# Altium PCB Drive-motor V1.0.2.PcbDoc
Units mm, origin at the board's own origin, x right, y up, seen from the top; angles counter-clockwise.
Board outline 118.48 x 107.72 mm, 4 copper layers (Top Layer, Mid-Layer 1, Mid-Layer 2, Bottom Layer); 68 components, 59 nets, 342 pads, 542 vias.
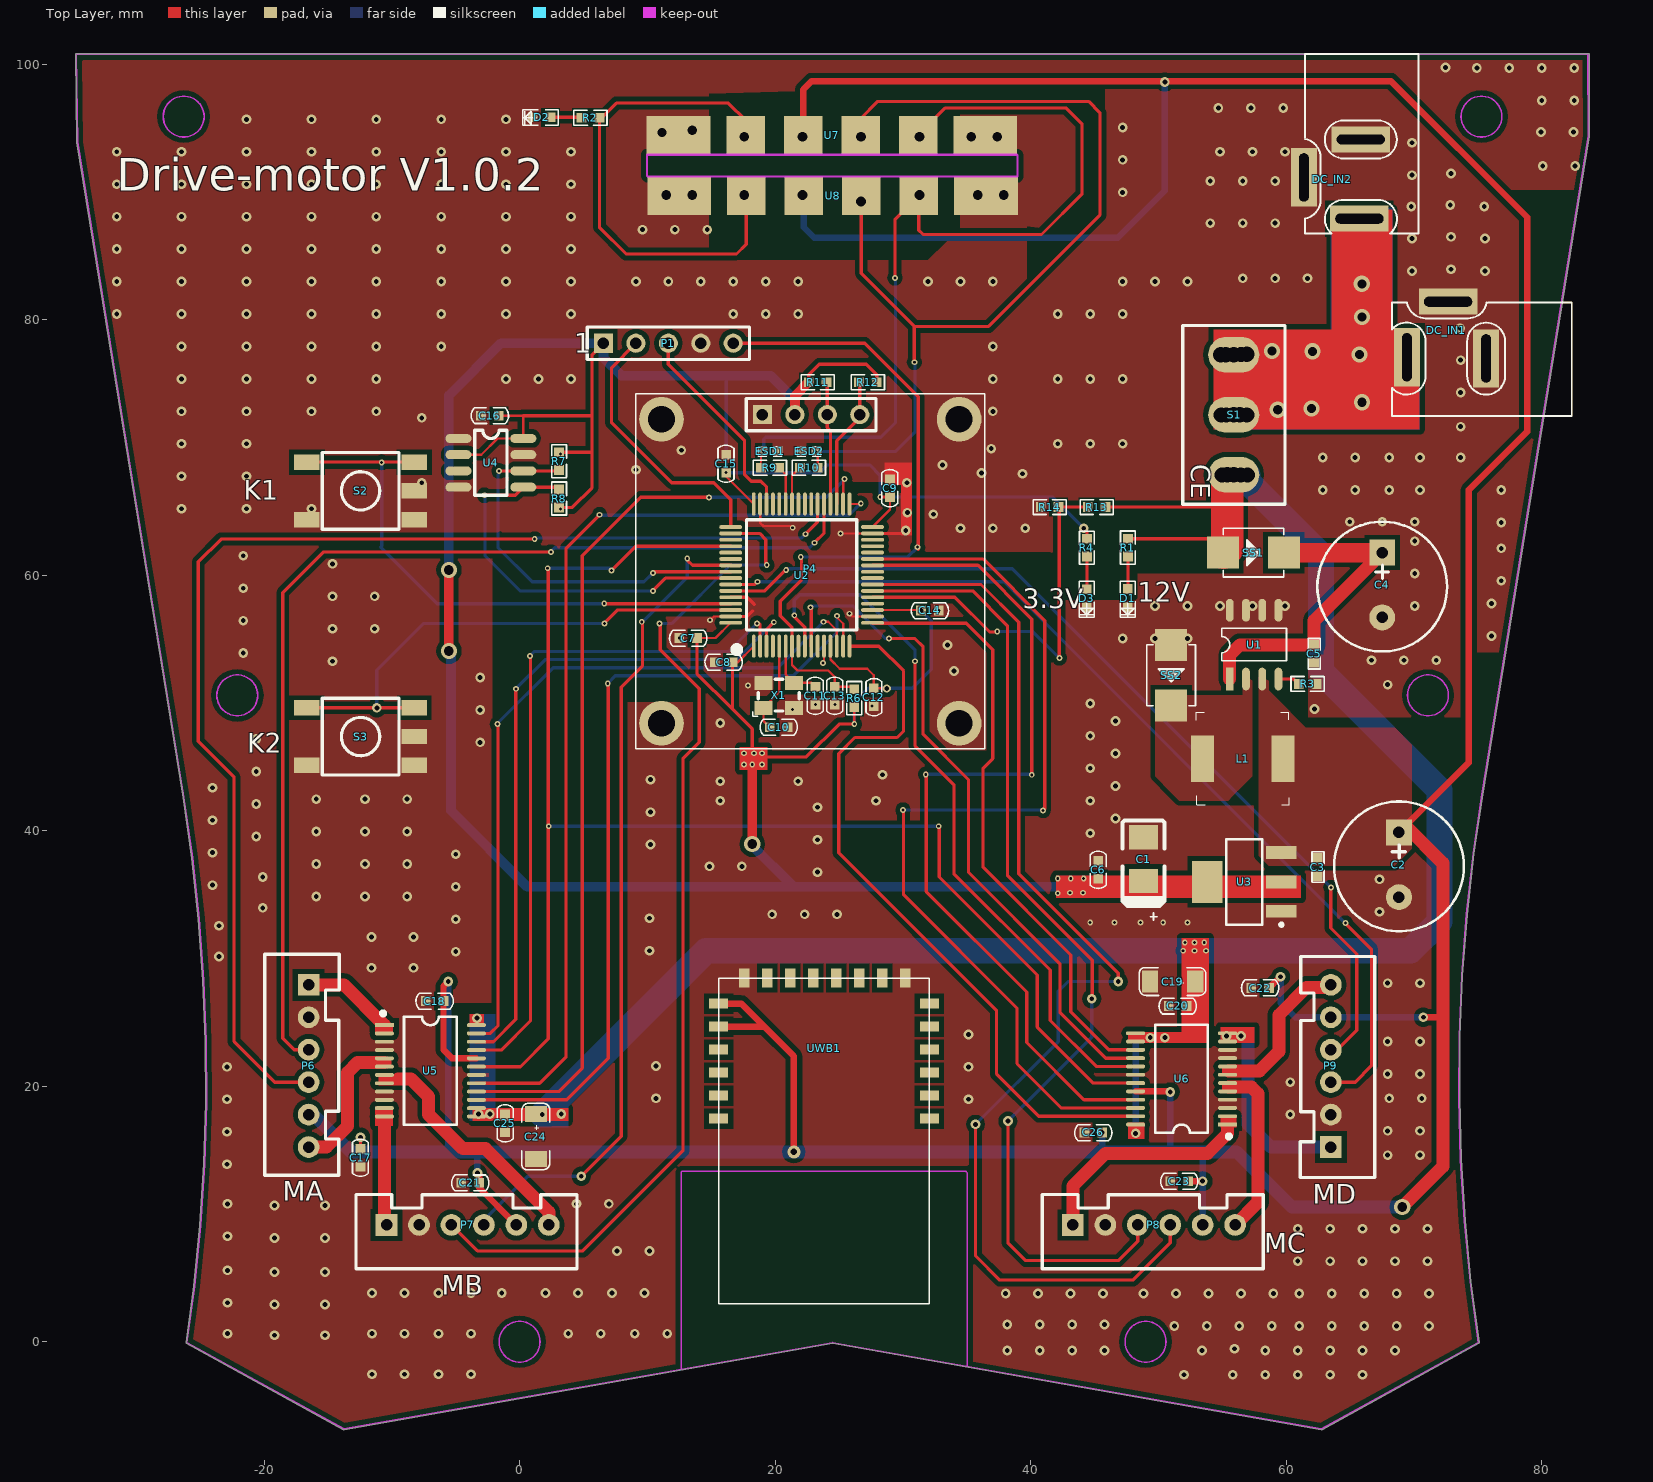
[diagram p0: Top Layer view]
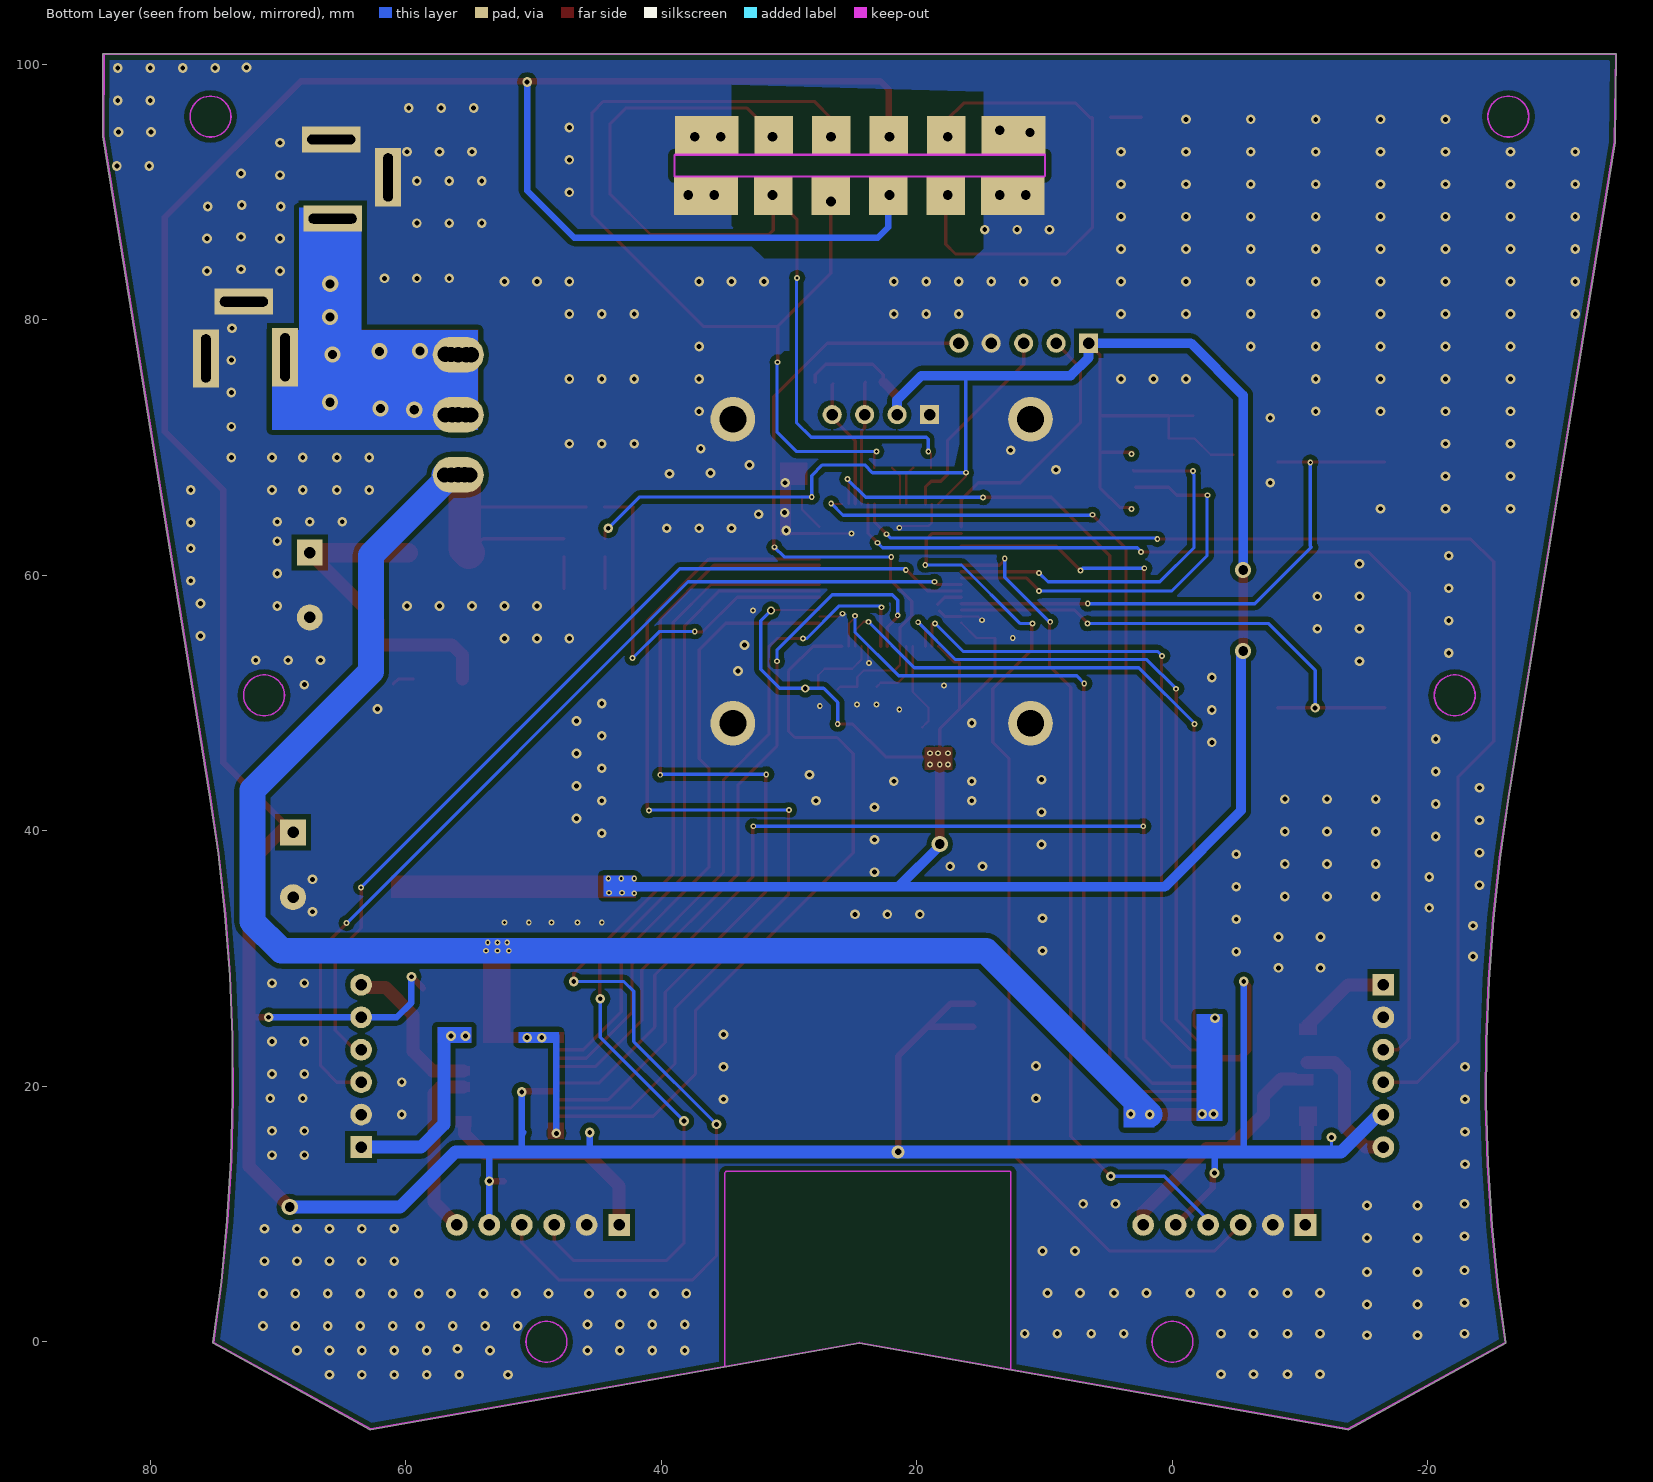
[diagram p1: Bottom Layer view, seen from below]

## Layer stack, top to bottom
Top Solder: solder mask 0.0102, Solder Resist, Dk 3.5
Top Layer: signal copper 0.0356
Dielectric 1: dielectric 0.32, FR-4, Dk 4.8
Mid-Layer 1: signal copper 0.0356
Dielectric3: dielectric 0.32, FR-4, Dk 4.8
Mid-Layer 2: signal copper 0.0356
Dielectric2: dielectric 0.32, FR-4, Dk 4.8
Bottom Layer: signal copper 0.0356
Bottom Solder: solder mask 0.0102, Solder Resist, Dk 3.5

## Board outline
-26.071,-0.119 ccw(c-26.04,-0.063) -26.071,-0.119 -13.791,-6.883 -13.79,-6.883 ccw(c-13.759,-6.827) -13.748,-6.89 24.499,-0.128 62.747,-6.89 ccw(c62.759,-6.827) 62.789,-6.883 62.79,-6.883 75.07,-0.119 ccw(c75.039,-0.063) 75.103,-0.063 ccw(c75.039,-0.063) 75.103,-0.055 ccw(c75.039,-0.063) 75.102,-0.054 75.103,-0.054 75.103,-0.055 75.102,-0.054 74.47,4.706 74.47,4.705 74.47,4.706 74.47,4.708 cw(c74.407,4.699) 74.47,4.708 74.47,4.706 74.004,9.481 74.004,9.482 74.004,9.481 74.004,9.48 74.004,9.481 73.704,14.269 73.704,14.268 73.704,14.269 73.704,14.271 73.704,14.269 73.571,19.065 73.604,23.863 73.804,28.656 74.17,33.44 74.701,38.208 75.337,42.577 83.729,94.374 ccw(c83.666,94.384) 83.73,94.384 83.73,100.766 ccw(c83.666,100.766) 83.649,100.827 ccw(c83.632,100.766) 83.632,100.83 -34.69,100.83 ccw(c-34.69,100.766) -34.754,100.765 -34.654,93.908 ccw(c-34.59,93.909) -34.653,93.899 cw(c-34.59,93.909) -34.654,93.908 -34.653,93.899 -26.342,42.605 -25.657,37.857 -25.657,37.855 -25.657,37.857 -25.138,33.087 -25.138,33.088 -25.138,33.087 -25.138,33.086 cw(c-25.074,33.093) -25.138,33.086 -25.138,33.087 -24.784,28.303 -24.784,28.304 -24.784,28.303 -24.784,28.302 -24.784,28.303 -24.597,23.509 -24.576,18.711 -24.576,18.712 -24.576,18.711 -24.722,13.916 -24.722,13.917 -24.722,13.916 -24.722,13.915 -24.722,13.916 -25.034,9.129 -25.034,9.13 -25.034,9.129 -25.034,9.127 -25.034,9.129 -25.512,4.355 -25.512,4.356 -25.512,4.355 -25.512,4.354 -25.512,4.355 -26.103,-0.054 ccw(c-26.04,-0.063)

## Design rules (kind name [scope] priority, off if disabled: settings)
Clearance [All] p1: gap=0.254 except(0.381: Arc-Poly Track-Poly SMDPad-Poly THPad-Poly Via-Poly Fill-Poly Poly-Poly)
PolygonConnect [All] p1: connectstyle=Direct reliefconductorwidth=0.254 reliefentries=4 polygonreliefangle="90 Angle" airgapwidth=0.254
RoutingVias [All] p1: holewidth=0.711 width=1.27 viastyle="Through Hole" minholewidth=0.711 minwidth=1.27 maxholewidth=0.711 maxwidth=1.27
SolderMaskExpansion [All] p1: expansion=0.102
Width Width_6 [All] p1: maxlimit=2.54 minlimit=0.254 preferedwidth=0.254 minimp=50.000000 maximp=50.000000 favimp=50.000000
Width Width_5 [All] p2: maxlimit=1.524 minlimit=0.254 preferedwidth=0.254 midlayer1_maxwidth=1.27 midlayer2_maxwidth=1.27 bottomlayer_maxwidth=1.27 minimp=50.000000 maximp=50.000000 favimp=50.000000
Width Width_4 [All] p3: maxlimit=0.254 minlimit=0.127 preferedwidth=0.254 minimp=50.000000 maximp=50.000000 favimp=50.000000
Width Width_3 [All] p4: maxlimit=1.27 minlimit=0.254 preferedwidth=0.254 minimp=50.000000 maximp=50.000000 favimp=50.000000
Width Width_2 [All] p5: maxlimit=0.254 minlimit=0.127 preferedwidth=0.254 minimp=50.000000 maximp=50.000000 favimp=50.000000
Width Width_1 [All] p6: maxlimit=2.54 minlimit=0.254 preferedwidth=0.254 minimp=50.000000 maximp=50.000000 favimp=50.000000
Width [All] p7: maxlimit=0.254 minlimit=0.254 preferedwidth=0.254
30 further rules are at their usual default settings.

## Components (designator, comment, footprint, x,y, rotation, side; value= is the part's Value field where it differs from the comment)
C1 "10uF" ALX_E 48.854,37.774 r90 top
C2 "470uF" "CAP POL [35V]" 68.834,37.338 r270 top
C3 "100nF" ALX_0603C 62.484,37.084 r270 top
C4 "470uF" "CAP POL [35V]" 67.523,59.237 r270 top
C5 "1uF" ALX_0603C 62.189,53.776 r270 top
C6 "100nF" 0603C 45.298,37.012 r90 top
C7 "100nF" 0603C 13.12,55.083 r180 top
C8 "100nF" 0603C 16.041,53.178 r0 top
C9 "100nF" 0603C 28.995,66.894 r90 top
C10 "12pF" 0603C 20.359,48.098 r0 top
C11 "12pF" 0603C 23.153,50.638 r90 top
C12 "100nF" 0603C 27.725,50.384 r270 top
C13 "100nF" 0603C 24.677,50.638 r90 top
C14 "100nF" 0603C 32.043,57.242 r180 top
C15 "100nF" 0603C 16.168,68.799 r90 top
C16 "100nF" 0603C -2.247,72.482 r0 top
C17 "100nF" 0603C -12.446,14.478 r90 top
C18 "100nF" 0603C -6.731,26.67 r180 top
C19 "Cap Pol" CAP[1206] 51.181,28.194 r180 top
C20 "100nF" 0603C 51.435,26.289 r180 top
C21 "100nF" 0603C -3.937,12.446 r180 top
C22 "100nF" 0603C 58.039,27.686 r0 top
C23 "100nF" 0603C 51.562,12.573 r180 top
C24 "Cap Pol" CAP[1206] 1.27,16.129 r270 top
C25 "100nF" 0603C -1.143,17.018 r270 top
C26 "100nF" 0603C 44.831,16.383 r180 top
D1 "LED" LED[0603] 47.618,58.227 r90 top
D2 "LED" LED[0603] 1.737,95.813 r0 top
D3 "LED" LED[0603] 44.409,58.221 r90 top
DC_IN1 "POWER" DC10B 75.651,77.017 r180 top
DC_IN2 "POWER" DC10B 65.786,94.107 r270 top
ESD1 "PGB1010402" ALX_0402A 20.105,69.688 r180 top
ESD2 "PGB1010402" ALX_0402A 23.153,69.688 r180 top
L1 "68uH" Inductor_0650_47UH 56.601,45.648 r0 top
P1 "SWD" H2.54-1X5 11.643,78.16 r0 top
P4 "H4X1" 0.96 9.103,46.41 r0 top
P6 "XH2.54_1*6" XH2.54-LI-6P -16.51,21.59 r270 top
P7 "XH2.54_1*6" XH2.54-LI-6P -4.064,9.144 r0 top
P8 "XH2.54_1*6" XH2.54-LI-6P 49.657,9.144 r0 top
P9 "XH2.54_1*6" XH2.54-LI-6P 63.5,21.59 r90 top
R1 "4.7K" ALX_0603A 47.618,62.164 r90 top
R2 "1K" ALX_0603A 5.547,95.813 r180 top
R3 "10K" ALX_0603A 61.681,51.49 r180 top
R4 "1K" ALX_0603A 44.409,62.158 r90 top
R6 "10K" ALX_0603A 26.201,50.384 r270 top
R7 "10K" ALX_0603A 3.087,68.926 r90 top
R8 "10K" ALX_0603A 3.087,66.005 r270 top
R9 "470R" ALX_0603A 19.597,68.418 r180 top
R10 "470R" ALX_0603A 22.645,68.418 r0 top
R11 "4.7K" ALX_0603A 23.327,75.112 r180 top
R12 "4.7K" ALX_0603A 27.264,75.112 r180 top
R13 "10K" ALX_0603A 45.171,65.333 r0 top
R14 "1K" ALX_0603A 41.488,65.333 r0 top
S1 "ALX_SW5" ALX_SW5 51.902,79.557 r270 top
S2 "SW-PB" "ALX_Key-4 -6" -12.446,66.603 r0 top
S3 "SW-PB" "ALX_Key-4 -6" -12.446,47.371 r0 top
SS1 "SS14" ALX_SSx4 55.077,61.777 r0 top
SS2 "SS14" ALX_SSx4 51.013,54.538 r270 top
U1 "XL1509" SOP8 55.585,51.871 r90 top
U2 "STM32F10x_LQFP64" LQFP64-10*10 18.327,54.448 r0 top
U3 "ME6118" SOT-223(AMS1117-3.3) 56.728,35.996 r90 top
U4 "CAT24WC256" SO-8 -4.787,70.704 r0 top
U5 "TB6612" SSOP24_L -6.985,21.209 r0 top
U6 "TB6612" SSOP24_L 51.816,20.574 r180 top
U7 "AOA3" "4ANTA - 3" 6.944,91.241 r0 top
U8 "AOA3" "4ANTA - 3" 41.996,92.892 r180 top (schematic designator U7)
UWB1 "MK1000" MK1000 15.58,26.471 r270 top
X1 "ALX_XT9" ALX_XT-9 19.089,49.622 r0 top

## Footprints (in the part's own frame and the unit in brackets; to place one, negate y for a bottom-side part, rotate by r counter-clockwise, add the part's x,y. Pads: shape width x height; smd on the part's side, far side on the other; paste and mask are expansions set on the pad)
0.96 [mm]
  round 3.5 hole 2.1: 1(2,2) 1(2,25.8) 1(25.3,2) 1(25.3,25.8)
  rect 1.5x1.5 hole 0.9: 1(9.906,26.162)
  round 1.5 hole 0.9: 2(12.446,26.162) 3(14.986,26.162) 4(17.526,26.162)
  silkscreen extent 0,0 27.3,27.8
"4ANTA - 3" [mm]
  rect 5x3 smd: 1(5.5,3.2) 1(29.5,3.2)
  rect 5x3 smd far side: 1(5.5,3.2) 1(29.5,3.2)
  rect 3x3 smd: 2(10.75,3.2) 3(15.25,3.2) 4(19.75,3.2) 5(24.25,3.2)
  rect 3x3 smd far side: 2(10.75,3.2) 3(15.25,3.2) 4(19.75,3.2) 5(24.25,3.2)
  Keep-Out Layer lines w0.127: 32,1.7 3,1.7 3,0 32,0 32,1.696 32.004,1.7
0603C [mil]
  rect 30x30 smd: 1(-30.5,0) 2(24.5,0)
  silkscreen extent -60,-24 54,25
ALX_0402A [mm]
  rect 0.635x0.635 smd: 1(0,0) 2(1,0)
  silkscreen extent -0.43,-0.38 1.42,0.38
ALX_0603A [mil]
  rect 30x30 smd: 1(-27.5,0) 2(27.5,0)
  silkscreen extent -51,-23 51,23
ALX_0603C [mil]
  rect 30x30 smd: 1(-30.5,0) 2(24.5,0)
  silkscreen extent -50,-18 44,19
ALX_E [mil]
  rect 75x90 smd: 1(-67.26,0.5) 2(67.74,0.5)
  silkscreen extent -188,-64 119,66
"ALX_Key-4 -6" [mm]
  rect 2x1.2 smd: 1(-4.2,2.25) 1(4.2,2.25) 2(-4.2,-2.25) 2(4.2,-2.25) 2(4.2,0)
  silkscreen extent -3,-3 3,3
ALX_SSx4 [mm]
  rect 2.5x2.5 smd: 1(-0.008,-0.011) 2(4.742,-0.011)
  silkscreen extent -0.01,-1.91 4.74,1.89
ALX_SW5 [mm]
  round 1.2 hole 1.2: 1(6.985,4.47) 1(7.01,5.004) 1(7.01,3.023) 1(7.01,3.404) 2(2.261,5.004) 2(2.286,4.572) 2(2.311,2.972) 2(2.311,3.378) 3(11.684,3.48) 3(11.709,4.547) 3(11.709,5.08) 3(11.709,3.073)
  oval 2.8x4 hole 1.2: 1(7,4) 2(2.3,4) 3(11.7,4)
  silkscreen extent 0,0 14,8
ALX_XT-9 [mm]
  rect 1.4x1.1 smd: 1(0,0) 2(2.388,0) 3(2.388,1.956) 4(0,1.956)
  silkscreen extent -0.84,-0.66 2.79,2.24
"CAP POL [35V]" [mil]
  rect 80x80 hole 35.43: 1(-100,0)
  round 80 hole 35.43: 2(100,0)
  silkscreen extent -195,-200 205,200
CAP[1206] [mil]
  rect 50x68 smd: 1(-67,0) 2(72,0)
  silkscreen extent -100,-43 105,43, body extent -63,-31 63,31, height 63
DC10B [mil]
  rect 80x180 hole 30 slot 148.11 at 90 deg: 1(244,-2) 2(0,2)
  rect 180x80 hole 30 slot 148.11 at 0 deg: 3(117,-173)
  silkscreen extent -264,-170 290,180
H2.54-1X5 [mm]
  rect 1.5x1.5 hole 0.9: 1(-5.08,0)
  round 1.5 hole 0.9: 2(-2.54,0) 3(0,0) 4(2.54,0) 5(5.08,0)
  silkscreen extent -6.35,-1.27 6.35,1.27, body extent -6.35,-1.27 6.35,1.27, height 8.54
Inductor_0650_47UH [mil]
  rect 70.87x143 smd: 1(-123.5,0) 2(123.5,0)
  silkscreen extent -143,-142 144,143, body extent -143,-143 144,144, height 165
LED[0603] [mil]
  rect 30x30 smd: 1(27,1) 2(-28,1)
  silkscreen extent -59,-23 51,24, body extent -35,-17 31,19, height 35
LQFP64-10*10 [mm] "10x10mm，0.5mm      联系卖家 免费查找封装"
  oval 0.3x1.8 smd: 1(0,0) 2(0.5,0) 3(1,0) 4(1.5,0) 5(2,0) 6(2.5,0) 7(3,0) 8(3.5,0) 9(4,0) 10(4.5,0) 11(5,0) 12(5.5,0) 13(6,0) 14(6.5,0) 15(7,0) 16(7.5,0) 33(7.5,11.125) 34(7,11.125) 35(6.5,11.125) 36(6,11.125) 37(5.5,11.125) 38(5,11.125) 39(4.5,11.125) 40(4,11.125) 41(3.5,11.125) 42(3,11.125) 43(2.5,11.125) 44(2,11.125) 45(1.5,11.125) 46(1,11.125) 47(0.5,11.125) 48(0,11.125)
  oval 1.8x0.3 smd: 17(9.3,1.825) 18(9.3,2.325) 19(9.3,2.825) 20(9.3,3.325) 21(9.3,3.825) 22(9.3,4.325) 23(9.3,4.825) 24(9.3,5.325) 25(9.3,5.825) 26(9.3,6.325) 27(9.3,6.825) 28(9.3,7.325) 29(9.3,7.825) 30(9.3,8.325) 31(9.3,8.825) 32(9.3,9.325) 49(-1.8,9.325) 50(-1.8,8.825) 51(-1.8,8.325) 52(-1.8,7.825) 53(-1.8,7.325) 54(-1.8,6.825) 55(-1.8,6.325) 56(-1.8,5.825) 57(-1.8,5.325) 58(-1.8,4.825) 59(-1.8,4.325) 60(-1.8,3.825) 61(-1.8,3.325) 62(-1.8,2.825) 63(-1.8,2.325) 64(-1.8,1.825)
  silkscreen extent -1.58,-0.52 8.07,9.89, body extent -2.25,-0.43 9.75,11.58, height 1.45
MK1000 [mm]
  rect 0.8x1.5 smd: 3(9,16.5) 4(7.2,16.5) 5(5.4,16.5) 7(1.8,16.5) 8(0,16.5) 17(0,0) 18(1.8,0) 19(3.6,0) 20(5.4,0) 21(7.2,0)
  rect 0.8x1.5 smd mask+0.102: 6(3.6,16.5) 22(9,0)
  rect 1.5x0.8 smd: 9(-2,14.6) 10(-2,12.8) 12(-2,9.2) 13(-2,7.4) 14(-2,5.6) 15(-2,3.8) 16(-2,2)
  rect 1.5x0.8 smd mask+0.102: 11(-2,11)
  silkscreen extent -2,0 23.5,16.5
SO-8 [mil]
  oval 80x28 smd: 1(0,0) 2(0,-50) 3(0,-100) 4(0,-150) 5(200,-150) 6(200,-100) 7(200,-50) 8(200,0)
  silkscreen extent 50,-175 150,25
SOP8 [mil]
  rect 70x24 smd: 1(0,0)
  oval 70x24 smd: 2(0,-50) 3(0,-100) 4(0,-150) 5(212.13,-150) 6(212.13,-100) 7(212.13,-50) 8(212.13,0)
  silkscreen extent 56,-175 156,25
SOT-223(AMS1117-3.3) [mm]
  rect 1x2.4 smd: 1(-2.3,-2.9) 2(0,-2.9) 3(2.3,-2.9)
  rect 3.3x2.4 smd: 4(0,2.9)
  silkscreen extent -3.47,-3.03 3.35,1.4, body extent -3.25,-3.48 3.25,3.48, height 1.7
SSOP24_L [mm] "8.3*7.8*1.6（长宽高）"
  rect 1.5x0.3 smd: 1(-3.6,3.575)
  oval 1.5x0.3 smd: 2(-3.6,2.925) 3(-3.6,2.275) 4(-3.6,1.625) 5(-3.6,0.975) 6(-3.6,0.325) 7(-3.6,-0.325) 8(-3.6,-0.975) 9(-3.6,-1.625) 10(-3.6,-2.275) 11(-3.6,-2.925) 12(-3.6,-3.575) 13(3.6,-3.575) 14(3.6,-2.925) 15(3.6,-2.275) 16(3.6,-1.625) 17(3.6,-0.975) 18(3.6,-0.325) 19(3.6,0.325) 20(3.6,0.975) 21(3.6,1.625) 22(3.6,2.275) 23(3.6,2.925) 24(3.6,3.575)
  silkscreen extent -3.83,-4.23 2.06,4.63, body extent -3.85,-4.15 3.85,4.15, height 1.65
XH2.54-LI-6P [mm] "接插件，6P"
  rect 1.7x1.7 hole 0.9: 1(-6.35,0)
  round 1.7 hole 0.9: 2(-3.81,0) 3(-1.27,0) 4(1.27,0) 5(3.81,0) 6(6.35,0)
  silkscreen extent -8.74,-3.43 8.56,2.39, body extent -8.85,-3.3 8.85,2.4, height 7.03

## Part data
C1 C2 C4: library part ALX_CAPACITOR, "Capacitor"
C3 C5 C6 C7 C8 C9 C10 C11 C12 C13 C14 C15 C16 C17 C18 C20 C21 C22 C23 C25 C26: library part ALX_CAP, "Capacitor"
DC_IN1 DC_IN2: library part POW
ESD1 ESD2: "Zener Diode"
L1: library part Inductor
P1: library part H5X1, "H5X1"
R1 R2 R4 R6 R7 R8 R9 R10 R11 R12 R13 R14: library part ALX_RES_1
R3: library part ALX_RES
S1: "SW"
S2 S3: library part ALX_SW-PB, "Switch"
SS1 SS2: library part ALX_SS24
U3: library part AMS1117-3.3
U4: library part FM24C64
U7 U8: "AOA2"
X1: "4 Pin Header"

## Via types
v1: diameter 0.762, hole 0.381, Top Layer to Bottom Layer, tented both sides, 420 vias
v2: diameter 0.457, hole 0.229, Top Layer to Bottom Layer, tented both sides, 91 vias
v3: diameter 1.27, hole 0.762, Top Layer to Bottom Layer, tented both sides, 19 vias
v4: diameter 1.27, hole 0.711, Top Layer to Bottom Layer, tented both sides, 9 vias
v5: diameter 0.635, hole 0.381, Top Layer to Bottom Layer, tented both sides, 2 vias
v6: diameter 1.016, hole 0.508, Top Layer to Bottom Layer, tented both sides, 1 vias

## Nets (pads, with @x,y where several pads share a name; then routed paths per layer and width w, separated by ;. In a path a pad name is that pad's centre, name@x,y a point inside that pad or via, vN(x,y) a via of type N, cw(c..) or ccw(c..) an arc to the next point about the centre after c; other vN are vias at no path point)
+3.3V: C1.1 C6.1 C7.1 C8.2 C9.1 C12.1 C14.2 C15.1 C16.2 P1.1 P4.2 R4.2 R6.2 R7.2 R8.2 R11.2 R12.1 U2.1 U2.13 U2.19 U2.32 U2.48 U2.64 U3.2 U3.4 U4.2 U4.8 | length 271.2
  Top Layer w0.178: U4.2 -3.009,69.434 -1.739,70.704 U4.8 0.293,72.482 C16.2 ; C7.1 15.337,55.083 U2.64 ; v2(16.168,68.024) 16.168,67.732 U2.48 ; C8.2 17.057,53.178 U2.1 ; U2.13 24.327,53.401 25.058,52.67 27.217,52.67 27.725,52.162 C12.1 28.728,51.159 v5(28.741,51.146) ; v2(26.201,48.352) R6.2 ; U2.19 31.389,57.273 C14.2 ; U2.32 28.995,65.141 C9.1
  Top Layer w0.254: 0.293,72.482 5.637,72.482 ; R8.2 4.124,65.306 5.674,66.857 5.674,77.271 P1.1 ; R7.2 5.648,69.624 ; C7.1@13.882,55.083 13.882,52.299 16.596,49.585 ; C8.2 16.663,49.652 16.596,49.585 ; 18.213,45.775 18.213,47.968 16.596,49.585 ; 19.009,45.775 22.438,45.775 25.015,48.352 v2(26.201,48.352) ; R11.2 22.629,75.683 23.454,76.509 27.137,76.509 27.963,75.683 R12.1 ; v2(28.233,66.132) 28.982,66.132 C9.1 ; v1(44.155,63.682) 44.409,63.428 R4.2
  Top Layer w0.762: v3(-5.536,54.067) v3(-5.536,60.417) v3@-5.536,60.507 ; v3(18.213,38.954) 18.213,45.775 ; P4.2 21.549,74.032 R11.2
  Bottom Layer w0.254: 15.961,75.62 16.168,75.413 v2(16.168,68.024) 23.478,68.024 24.089,68.635 27.391,68.635 28.233,67.793 v2(28.233,66.132) 41.705,66.132 v1(44.155,63.682) ; v2(26.201,48.352) 26.201,50.046 27.301,51.146 v5(28.741,51.146) 30.73,51.146 32.217,52.633 32.217,56.433 v5(31.408,57.242)
  Bottom Layer w0.762: v3(-5.536,60.417) -5.536,74.062 -1.438,78.16 P1.1 6.563,77.017 7.96,75.62 15.961,75.62 19.644,75.62 21.549,73.715 P4.2 ; v3@-5.375,53.903 -5.375,41.584 0.594,35.615 21.422,35.615 ; v3@18.148,38.889 21.422,35.615 ; 43.774,35.615 21.422,35.615
  other v2: 42.123,35.107 43.092,35.144 44.108,35.144 42.123,36.25 43.139,36.25 44.155,36.25 17.578,45.177 18.213,45.177 18.975,45.177 17.578,46.066 18.34,46.066 18.975,46.066 3.214,65.179 3.214,69.497
+5V: C2.1 C3.1 C17.2 C18.1 C21.1 C22.2 C23.1 C26.1 L1.2 P6.5 P7.5 P8.5 P9.5 U1.3 U3.3 U5.20 U6.20 U7.3 U8.4 UWB1.17 UWB1.18 | length 360.7
  Top Layer w0.254: C17.2 v1(-12.446,16.002)
  Top Layer w0.508: v1(-5.588,28.194) -5.956,27.826 C18.1 -5.956,22.847 -5.293,22.184 U5.20 ; v1(-3.302,13.208) -3.162,13.068 C21.1 -3.162,12.052 P7.5 ; UWB1.18 19.114,24.671 19.136,24.693 ; UWB1.17 17.358,26.471 19.136,24.693 ; v6(21.463,14.859) 21.463,22.366 19.136,24.693 ; U7.3@22.194,94.441 22.194,98.013 22.86,98.679 68.199,98.679 78.867,88.011 78.867,71.247 74.295,66.675 74.295,45.339 69.342,40.386 C2.1 ; U6.20 v1@50.886,19.599 ; C23.1 v1(53.467,12.573) ; C22.2 59.423,28.448 v1@59.563,28.448 ; v1(70.739,25.4) 72.263,25.4
  Top Layer w1.016: v3(69.088,10.541) 72.263,13.716 72.263,25.4 72.263,37.465 C2.1@69.342,40.386
  Bottom Layer w0.254: -12.446,14.986 v1(-12.446,16.002)
  Bottom Layer w0.508: -5.588,14.859 v1(-5.588,28.194) ; v1(-3.302,13.208) -3.302,14.859 ; U8.4@22.246,89.692 22.246,87.242 23.073,86.415 46.822,86.415 50.505,90.098 v1(50.505,98.607) ; 45.606,15.1 v1(45.606,16.383) ; 50.8,14.859 50.927,14.986 50.927,16.256 ; 50.8,16.383 50.927,16.256 ; v1(50.927,19.558) 50.927,16.256 ; P8.5 v1(53.467,12.573) 53.467,14.732 53.594,14.859 ; v1(59.563,28.575) 59.563,26.543 60.706,25.4 P9.5 v1(70.739,25.4)
  Bottom Layer w1.016: P6.5 -16.129,17.78 -13.208,14.859 -5.588,14.859 -3.302,14.859 v6(21.463,14.859) 50.8,14.859 53.594,14.859 56.134,14.859 60.452,10.541 v3(69.088,10.541)
  other v3: 22.15,89.754 22.15,94.326
+12V: C19.1 C20.1 C24.1 C25.1 R1.2 R13.2 S1.3 SS1.1 U5.13 U5.14 U5.24 U6.13 U6.14 U6.24 | length 149.5
  Top Layer w0.254: R13.2 55.073,65.333 ; R1.2 53.972,62.863 SS1.1
  Top Layer w2.54: SS1.1 55.382,62.078 S1.3@55.382,67.873
  Bottom Layer w0.508: v1(48.219,16.311) 48.219,23.962 48.26,24.003
  Bottom Layer w2.032: v1(1.778,17.78) 14.605,30.607 69.723,30.607 72.009,32.893 72.009,43.18 62.738,52.451 62.738,61.558 56.449,67.847 S1.3@56.982,67.847
  other v1: -3.216,17.835 -2.327,17.835 3.261,17.835 49.362,23.804 50.505,23.804 -3.343,25.328
  other v2: 51.943,30.607 52.832,30.607 53.721,30.607 52.07,31.242 52.832,31.242 53.594,31.242
ADC: R13.1 R14.2 U2.21 | length 30.6
  Top Layer w0.254: U2.21 34.07,58.273 36.789,55.554 v2@37.297,55.554 ; R14.2 R14.2@42.25,65.333 ; v2(42.25,53.522) R14.2@42.25,65.333 ; R13.1 R14.2@42.25,65.333
  Bottom Layer w0.254: v2(37.39,55.591) 40.181,55.591 v2(42.25,53.522)
AIN1: U2.2 U5.21 | length 54.4
  Top Layer w0.254: U5.21 -1.423,22.834 0.848,25.105 v2@0.848,53.522 ; v2@18.628,56.316 18.827,56.117 U2.2
  Bottom Layer w0.254: v2(0.801,53.686) 1.145,54.03 16.385,54.03 v2(18.581,56.226)
AIN2: U2.3 U5.22 | length 54.1
  Top Layer w0.254: U5.22 -2.043,23.484 -0.295,25.232 v2(-0.295,51.109) ; U2.3 19.327,55.745 v2(19.898,56.316)
  Bottom Layer w0.254: v2(-0.295,51.109) 1.991,53.395 16.977,53.395 v2(19.898,56.316)
AOUT1: P6.1 U5.1 U5.2 | length 7.2
  Top Layer w1.016: P6.1 -13.741,27.94 U5.1
AOUT2: P6.6 U5.5 U5.6 | length 11.2
  Top Layer w1.016: P6.6 -15.113,15.24 -13.462,16.891 -13.462,21.082 -12.7,21.844 -10.541,21.844
BIN1: U2.33 U5.17 | length 73.2
  Top Layer w0.178: U2.33 26.659,65.573 v2(26.709,65.624)
  Top Layer w0.254: U5.17 1.565,20.234 3.642,22.311 3.642,62.115 v2(6.262,64.735)
  Bottom Layer w0.254: v2@6.182,64.698 25.783,64.698 v2(26.709,65.624)
BIN2: U2.34 U5.16 | length 74.2
  Top Layer w0.178: U2.34 25.327,67.417 v2(25.439,67.529)
  Top Layer w0.254: U5.16 3.074,19.584 4.912,21.422 4.912,61.523 9.484,66.095 v2(14.818,66.095)
  Bottom Layer w0.254: v2(14.818,66.095) 24.005,66.095 v2(25.439,67.529)
BOUT1: P7.1 U5.11 U5.12 | length 8.6
  Top Layer w1.016: U5.12 -10.585,9.315 P7.1
BOUT2: P7.6 U5.7 U5.8 | length 18
  Top Layer w1.016: -9.525,20.574 -8.509,20.574 -7.112,19.177 -7.112,17.78 -4.445,15.113 -2.667,15.113 2.286,10.16 P7.6
CIN1: U2.26 U6.21 | length 69.4
  Top Layer w0.254: U2.26 35.888,60.773 40.091,56.57 v2(40.091,44.378) ; v2@31.836,44.505 31.836,35.234 39.695,27.376 39.695,23.424 44.17,18.949 U6.21
  Bottom Layer w0.254: v2(31.789,44.415) 40.054,44.415 v2(40.091,44.378)
CIN2: U2.27 U6.22 | length 75.6
  Top Layer w0.254: U2.27 36.277,61.273 41.107,56.443 41.107,41.711 v2(40.98,41.584) ; v2@30.058,41.621 30.058,34.98 38.933,26.106 38.933,21.773 42.407,18.299 U6.22
  Bottom Layer w0.254: v2(30.011,41.621) 40.943,41.621 v2(40.98,41.584)
COUT1: P8.1 U6.1 U6.2 | length 17.6
  Top Layer w1.016: P8.1 43.307,12.192 45.847,14.732 53.848,14.732 55.416,16.3 U6.1
COUT2: P8.6 U6.5 U6.6 | length 13.5
  Top Layer w1.016: 55.499,19.939 57.277,19.939 57.785,19.431 57.785,10.922 P8.6
DIN1: U2.9 U6.17 | length 56.7
  Top Layer w0.254: v2@21.549,56.697 22.327,55.919 U2.9 ; v2(30.947,53.268) 30.947,46.664 33.995,43.616 33.995,36.631 41.529,29.097 41.529,25.146 45.126,21.549 U6.17
  Bottom Layer w0.254: v2(21.502,56.861) 21.502,58.047 21.93,58.475 26.629,58.475 30.947,54.157 v2(30.947,53.268)
DIN2: U2.10 U6.16 | length 53.5
  Top Layer w0.254: v2@22.819,57.332 22.827,57.324 U2.10 ; v2(28.915,55.046) 30.947,55.046 31.582,54.411 31.582,47.553 35.138,43.997 35.138,36.758 42.291,29.605 42.291,25.781 45.873,22.199 U6.16
  Bottom Layer w0.254: v2(22.78,57.488) 22.89,57.597 26.073,57.597 28.624,55.046 v2(28.915,55.046)
DOUT1: P9.1 U6.11 U6.12 | length 14.2
  Bottom Layer w1.016: 57.023,24.003 57.023,17.018 58.801,15.24 P9.1
  other v1: 55.331,23.931 56.474,23.931
DOUT2: P9.6 U6.7 U6.8 | length 12.6
  Top Layer w1.016: 55.499,21.209 57.912,21.209 59.436,22.733 59.436,25.582 61.595,27.741 63.5,27.741 P9.6
E1A: P6.3 U2.37 | length 83.8
  Top Layer w0.254: P6.3 -17.653,22.86 -18.542,23.749 -18.542,58.639 -15.367,61.814 v2(2.452,61.814) ; v2(23.073,62.539) 23.827,63.293 U2.37
  Bottom Layer w0.254: v2@2.499,61.904 2.753,62.158 22.692,62.158 v2(23.073,62.539)
E1B: P6.4 U2.38 | length 96.9
  Top Layer w0.254: P6.4 -19.177,20.32 -22.352,23.495 -22.352,44.196 -25.146,46.99 -25.146,61.052 -23.368,62.83 v2(1.182,62.83) ; v2@22.438,63.301 23.327,64.19 U2.38
  Bottom Layer w0.254: v2@1.229,62.92 22.1,62.92 v2(22.391,63.211)
E2A: P7.3 U2.50 | length 80.2
  Top Layer w0.254: P7.3 -3.302,7.112 4.953,7.112 12.786,14.945 12.786,45.648 14.056,46.918 14.056,51.109 11.008,54.157 v2@11.008,56.062 ; U2.50 18.783,63.273 19.263,62.793 v2@19.263,60.888
  Bottom Layer w0.254: v2(10.961,56.226) 11.934,56.226 16.506,60.798 v2(19.343,60.798)
E2B: P7.4 U2.55 | length 64.9
  Top Layer w0.254: v1(4.826,12.954) 7.96,16.088 7.96,51.236 9.611,52.887 v2@9.611,56.443 ; v2@13.167,61.142 13.536,60.773 U2.55
  Bottom Layer w0.254: P7.4 -2.794,9.525 0.635,12.954 v1(4.826,12.954) ; v2(9.564,56.353) 9.648,56.353 13.12,59.825 v2(13.12,61.306)
E3A: P8.3 U2.22 | length 78.1
  Top Layer w0.254: U2.22 35.475,58.773 38.186,56.062 38.186,36.504 44.831,29.859 v1@44.831,26.852 ; v1(38.227,17.272) 38.227,7.747 39.624,6.35 46.863,6.35 48.387,7.874 P8.3
  Bottom Layer w0.254: v1(38.227,17.272) 44.79,23.835 v1(44.79,26.852)
E3B: P8.4 U2.23 | length 91.1
  Top Layer w0.254: U2.23 36.118,59.273 39.075,56.316 39.075,36.631 46.863,28.843 v1(46.863,28.194) ; v1(35.687,17.018) 35.687,6.731 37.592,4.826 48.006,4.826 50.927,7.747 P8.4
  Bottom Layer w0.254: v1(35.687,17.018) 42.164,23.495 42.164,27.432 42.926,28.194 v1(46.863,28.194)
E4A: P9.3 U2.58 | length 75
  Top Layer w0.254: U2.58 18.411,59.273 v2(18.628,59.491) ; P9.3 65.405,20.32 66.675,21.59 66.675,30.734 v2(64.643,32.766)
  Bottom Layer w0.254: v2(18.628,59.491) 37.918,59.491 v2(64.643,32.766)
E4B: P9.4 U2.59 | length 72.7
  Top Layer w0.254: U2.59 19.181,58.773 v2@20.914,60.507 ; P9.4 64.008,22.86 65.532,24.384 65.532,30.353 63.5,32.385 v2(63.5,35.56)
  Bottom Layer w0.254: v2@20.914,60.507 38.567,60.507 v2@63.507,35.567
  other v2: 20.867,60.417
EEPROM-SCK: R7.1 U2.56 U4.6 | length 30.2
  Top Layer w0.254: v2(-1.612,68.164) U4.6 3.024,68.164 R7.1 ; v2@10.5,60.253 10.521,60.273 U2.56
  Bottom Layer w0.254: v2@-1.565,68 -1.692,67.873 -1.692,62.158 0.975,59.491 9.738,59.491 10.41,60.163 v2(10.453,60.163)
EEPROM-SDA: R8.1 U2.57 U4.5 | length 31.5
  Top Layer w0.254: v2(-2.755,66.259) -0.342,66.259 U4.5 R8.1@2.897,66.894 ; v2@10.5,58.856 11.418,59.773 U2.57
  Bottom Layer w0.254: v2@-2.708,66.349 -2.708,61.523 0.049,58.766 v2(10.453,58.766)
GND: C1.2 C2.2 C3.2 C4.2 C5.2 C6.2 C7.2 C8.1 C9.2 C10.2 C11.1 C12.2 C13.1 C14.1 C15.2 C16.1 C17.1 C18.2 C19.2 C20.2 C21.2 C22.1 C23.2 C24.2 C25.2 C26.2 D1.2 D2.2 D3.2 DC_IN1.2 DC_IN1.3 DC_IN2.2 DC_IN2.3 ESD1.1 ESD2.2 P1.4 P4.1 P6.2 P7.2 P8.2 P9.2 R3.1 R14.1 S2.2 S3.2 SS2.1 U1.5 U1.6 U1.7 U1.8 U2.12 U2.18 U2.31 U2.47 U2.60 U2.63 U3.1 U4.1 U4.4 U4.7 U5.3 U5.4 U5.9 U5.10 U5.18 U6.3 U6.4 U6.9 U6.10 U6.18 U7.1 U8.1 UWB1.9 UWB1.16 X1.2 X1.4 | length 22.2
  Top Layer w0.178: v2(14.898,56.48) 15.192,56.773 U2.63 ; U2.47 18.827,64.108 19.089,63.846 21.248,63.846 v2(21.375,63.719) ; v2@23.661,53.051 23.827,53.217 U2.12 ; v2@25.058,63.211 v2(25.121,63.273) U2.31 ; v2(25.82,56.988) 26.035,56.773 U2.18
  Top Layer w0.254: U2.63 17.816,56.773 18.247,57.205 ; U2.60 17.814,58.273 18.374,57.713 ; U2.31 29.999,63.273 v1(30.226,63.5) ; 30.226,64.008 30.226,67.691
  other v1: 52.015,-2.581 55.825,-2.581 58.365,-2.581 60.905,-2.581 63.445,-2.581 65.985,-2.581 -11.557,-2.54 -9.017,-2.54 -6.35,-2.54 -3.81,-2.54 38.172,-0.676 40.712,-0.676 43.252,-0.676 45.792,-0.676 53.412,-0.676 58.365,-0.676 60.905,-0.676 63.445,-0.676 65.985,-0.676 68.525,-0.676 55.952,-0.549 -19.177,0.508 -15.24,0.508 -22.86,0.635 -11.557,0.635 -9.017,0.635 -6.35,0.635 -3.81,0.635 3.81,0.635 6.35,0.635 9.017,0.635 11.557,0.635 51.253,1.229 53.793,1.229 56.333,1.229 58.873,1.229 61.032,1.229 63.572,1.229 66.112,1.229 68.652,1.229 71.192,1.229 38.172,1.356 40.712,1.356 43.252,1.356 45.792,1.356 -19.177,2.921 -15.24,2.921 -22.86,3.048 38.045,3.769 40.585,3.769 43.125,3.769 45.665,3.769 48.84,3.769 51.38,3.769 53.92,3.769 56.46,3.769 59,3.769 61.032,3.769 63.572,3.769 66.112,3.769 68.652,3.769 71.192,3.769 -11.557,3.81 -9.017,3.81 -6.35,3.81 -3.81,3.81 -1.397,3.81 2.032,3.81 4.572,3.81 7.239,3.81 9.779,3.81 -19.177,5.461 -15.24,5.461 -22.86,5.588 60.905,6.309 63.445,6.309 65.985,6.309 68.525,6.309 71.065,6.309 7.62,7.112 10.16,7.112 -19.177,8.128 -15.24,8.128 -22.86,8.255 60.905,8.849 63.445,8.849 65.985,8.849 68.525,8.849 71.065,8.849 -19.177,10.668 -15.24,10.668 -22.86,10.795 4.445,10.795 6.985,10.795 -22.901,13.898 67.945,14.605 70.485,14.605 -22.901,16.438 67.945,16.51 70.485,16.51 60.325,17.78 -22.901,18.978 35.138,18.978 10.668,19.05 68.072,19.05 70.612,19.05 60.325,20.32 67.945,20.955 70.485,20.955 -22.901,21.518 35.138,21.518 10.668,21.59 67.945,23.495 70.485,23.495 35.138,24.058 67.945,28.067 70.485,28.067 -11.598,29.265 -8.296,29.265 -23.536,30.154 -4.994,30.535 10.16,30.607 -11.598,31.678 -8.296,31.678 -23.536,32.567 -4.994,33.075 10.16,33.147 19.771,33.456 22.311,33.456 24.851,33.456 67.31,33.655 -20.107,33.964 -15.916,34.853 -12.106,34.853 -8.804,34.853 -4.994,35.615 -24.044,35.742 67.31,36.195 -20.107,36.377 23.327,36.758 14.859,37.211 17.399,37.211 -15.916,37.393 -12.106,37.393 -8.804,37.393 -4.994,38.155 -24.044,38.282 10.246,38.917 23.327,39.298 -20.615,39.552 44.663,39.806 -15.916,39.933 -12.106,39.933 -8.804,39.933 -24.044,40.822 46.65,40.966 10.246,41.457 23.327,41.838 -20.615,42.092 15.707,42.346 27.899,42.346 44.663,42.346 -15.916,42.473 -12.106,42.473 -8.804,42.473 -24.044,43.362 46.65,43.506 15.707,43.87 21.803,43.87 10.246,43.997 28.407,44.378 -20.615,44.632 44.663,44.886 46.65,46.046 -3.089,46.918 -20.615,47.172 44.663,47.426 15.707,48.442 46.65,48.586 -3.089,49.458 62.23,49.53 44.663,49.966 67.945,51.435 -3.089,51.998 33.995,52.506 -14.646,53.268 66.675,53.34 69.215,53.34 71.755,53.34 -21.631,53.903 33.487,54.538 47.203,55.046 49.743,55.046 52.283,55.046 76.073,55.245 -14.646,55.808 -11.344,55.808 -21.631,56.443 49.743,57.586 52.283,57.586 54.823,57.586 57.363,57.586 59.903,57.586 70.063,57.586 76.073,57.785 -14.646,58.348 -11.344,58.348 -21.631,58.983 76.835,59.563 70.063,60.126 -14.646,60.888 -21.631,61.523 76.835,62.103 70.063,62.666 34.503,63.682 37.043,63.682 39.583,63.682 76.835,64.135 64.983,64.19 67.523,64.19 70.063,64.19 32.385,64.77 30.353,64.897 -26.457,65.206 -21.377,65.206 -16.297,65.206 62.865,66.675 65.405,66.675 68.072,66.675 70.485,66.675 76.835,66.675 -7.661,67.238 30.312,67.238 -26.457,67.746 -21.377,67.746 39.37,67.945 36.154,68 9.103,68.254 33.106,68.635 62.865,69.215 65.405,69.215 68.072,69.215 70.485,69.215 73.66,69.215 12.659,69.778 36.916,69.905 -26.457,70.286 -21.377,70.286 42.123,70.286 44.663,70.286 47.203,70.286 73.66,71.628 -7.661,72.318 -26.457,72.826 -21.377,72.826 -16.297,72.826 -11.217,72.826 37.043,72.826 73.66,74.295 -26.457,75.366 -21.377,75.366 -16.297,75.366 -11.217,75.366 -1.057,75.366 1.483,75.366 4.023,75.366 37.043,75.366 42.123,75.366 44.663,75.366 47.203,75.366 73.66,76.835 -26.457,77.906 -21.377,77.906 -16.297,77.906 -11.217,77.906 -6.137,77.906 37.043,77.906 73.605,79.334 -31.537,80.446 -26.457,80.446 -21.377,80.446 -16.297,80.446 -11.217,80.446 -6.137,80.446 -1.057,80.446 4.023,80.446 16.723,80.446 19.263,80.446 21.803,80.446 42.123,80.446 44.663,80.446 47.203,80.446 -31.537,82.986 -26.457,82.986 -21.377,82.986 -16.297,82.986 -11.217,82.986 -6.137,82.986 -1.057,82.986 4.023,82.986 9.103,82.986 11.643,82.986 14.183,82.986 16.723,82.986 19.263,82.986 21.803,82.986 31.963,82.986 34.503,82.986 37.043,82.986 47.203,82.986 49.743,82.986 52.283,82.986 56.601,83.24 59.141,83.24 61.681,83.24 69.85,83.82 75.565,83.82 72.898,83.947 -31.537,85.526 -26.457,85.526 -21.377,85.526 -16.297,85.526 -11.217,85.526 -6.137,85.526 -1.057,85.526 4.023,85.526 69.85,86.36 75.565,86.36 72.898,86.487 9.611,87.05 12.151,87.05 14.691,87.05 54.061,87.558 56.601,87.558 59.141,87.558 -31.537,88.066 -26.457,88.066 -21.377,88.066 -16.297,88.066 -11.217,88.066 -6.137,88.066 -1.057,88.066 4.023,88.066 69.795,88.859 75.51,88.859 72.843,88.986 47.203,89.971 -31.537,90.606 -26.457,90.606 -21.377,90.606 -16.297,90.606 -11.217,90.606 -6.137,90.606 -1.057,90.606 4.023,90.606 54.061,90.86 56.601,90.86 59.141,90.86 69.85,91.313 72.898,91.44 80.082,92.034 82.622,92.034 47.203,92.511 -31.537,93.146 -26.457,93.146 -21.377,93.146 -16.297,93.146 -11.217,93.146 -6.137,93.146 -1.057,93.146 4.023,93.146 54.823,93.146 57.363,93.146 59.903,93.146 69.85,93.853 79.955,94.701 82.495,94.701 47.203,95.051 -21.377,95.686 -16.297,95.686 -11.217,95.686 -6.137,95.686 -1.057,95.686 54.696,96.575 57.236,96.575 59.776,96.575 80.01,97.155 82.55,97.155 74.93,99.695 77.47,99.695 80.01,99.695 82.55,99.695 72.476,99.75
  other v2: 44.663,32.821 46.568,32.821 48.6,32.821 50.378,32.821 52.283,32.821 21.375,49.495 27.598,49.762 23.153,49.876 24.677,49.876 17.866,51.363 23.744,53.134 12.498,55.083 32.818,57.242
  other v3: 11.482,89.754 13.514,89.754 35.866,89.754 37.898,89.754 35.358,94.326 37.39,94.326 13.514,94.834
  other v4: 11.135,94.67
KEY1: S2.1 U2.61 | length 44.3
  Top Layer w0.254: S2.1@-16.646,68.853 S2.1@-8.246,68.853 ; v2(6.624,57.773) U2.61
  Bottom Layer w0.254: v2(-10.795,68.834) -10.795,62.293 -10.883,62.205 -6.451,57.773 v2(6.624,57.773)
KEY2: S3.1 U2.62 | length 40.9
  Top Layer w0.254: S3.1@-16.646,49.621 v1(-11.176,49.621) S3.1@-8.246,49.621 ; v2@6.69,56.316 7.648,57.273 U2.62
  Bottom Layer w0.254: v1(-11.176,49.621) -11.176,52.547 -7.497,56.226 v2(6.643,56.226)
LED1: U2.29
LED2: U2.30
MCU_RST: C13.2 P1.5 R6.1 U2.7 | length 53.2
  Top Layer w0.178: U2.7 21.327,52.972 21.756,52.543 24.169,52.543 24.677,52.035 C13.2 26.023,51.26 R6.1
  Top Layer w0.254: P1.5 27.01,78.16 31.201,73.969 v2@31.201,62.031 ; U2.7 21.327,55.903 20.406,56.824 20.406,57.967 22.057,59.618 v2@22.057,61.433
  Bottom Layer w0.254: v2(22.01,61.433) 30.392,61.433 v2(31.154,62.195)
NetC4_1: C4.1 C5.1 SS1.2 U1.1 | length 25.8
  Top Layer w1.016: U1.1 55.585,53.75 56.385,54.551 C5.1@62.049,54.551 ; C5.1 62.189,56.443 C4.1@67.512,61.765
  Top Layer w1.524: SS1.2 C4.1@67.512,61.765
NetD1_1: D1.1 R1.1 | length 2.5
  Top Layer w0.254: D1.1@47.618,58.938 R1.1
NetD2_1: D2.1 R2.2 | length 2.4
  Top Layer w0.254: D2.1 R2.2@4.823,95.838
NetD3_1: D3.1 R4.1 | length 2.5
  Top Layer w0.254: D3.1@44.409,58.932 R4.1
NetL1_1: L1.1 SS2.2 U1.2
NetR2_1: R2.1 U7.2 U8.5 | length 38.7
  Top Layer w0.254: U7.2@17.694,94.441 17.694,95.604 16.342,96.956 7.579,96.956 6.436,95.813 R2.1 6.246,87.24 8.341,85.145 16.977,85.145 17.746,85.914 U8.5@17.746,89.692
  other v3: 17.578,89.754 17.578,94.326
NetR3_2: R3.2 U1.4 | length 1.7
  Top Layer w0.254: U1.4 60.602,51.871 R3.2
NetR9_1: R9.1 U2.43 | length 3.1
  Top Layer w0.178: R9.1 20.827,67.886 U2.43
NetR10_1: R10.1 U2.42 | length 3.1
  Top Layer w0.178: U2.42 21.327,67.798 R10.1
OLED-SCK: P4.3 R11.1 U2.36 | length 9.7
  Top Layer w0.254: R11.1 24.089,75.048 P4.3 24.089,71.556 24.327,71.318 U2.36
OLED-SDA: P4.4 R12.2 U2.35 | length 10.2
  Top Layer w0.254: U2.35 24.827,70.516 26.629,72.318 P4.4 26.629,74.921 R12.2@26.566,74.985
PWMA: U2.14 U5.23 | length 57
  Top Layer w0.178: v2@23.661,56.353 v2(23.788,56.353) 24.169,56.353 24.827,55.695 U2.14
  Top Layer w0.254: U5.23 -2.282,24.134 -1.692,24.724 v2@-1.692,48.352
  Bottom Layer w0.254: v2@-1.692,48.442 2.626,52.76 20.195,52.76 v2(23.788,56.353)
  other v2: -1.739,48.352
PWMB: U2.15 U5.15 | length 64.7
  Top Layer w0.178: v2(24.851,56.824) 24.714,56.824 25.327,56.211 U2.15
  Top Layer w0.254: U5.15 3.694,18.934 6.944,22.184 v2@6.944,51.527
  Bottom Layer w0.254: v2(6.897,51.527) 7.495,52.125 21.422,52.125 24.851,55.554 v2(24.851,56.824)
PWMC: U2.16 U6.23 | length 58
  Top Layer w0.254: U2.16@25.858,54.448 28.116,54.448 30.058,52.506 30.058,47.807 29.55,47.299 26.248,47.299 24.978,46.029 24.978,38.282 37.338,25.922 37.338,20.955 40.644,17.649 U6.23
PWMD: U2.17 U6.15 | length 48.1
  Top Layer w0.254: U2.17@27.627,56.242 34.958,56.242 37.043,54.157 37.043,45.648 36.281,44.886 36.281,37.139 43.146,30.274 43.146,25.815 46.112,22.849 U6.15
RXD: ESD1.2 R9.2 U7.5 U8.2 | length 68.4
  Top Layer w0.178: R9.2 18.899,69.481 v2(19.105,69.688)
  Top Layer w0.254: v2(29.376,83.277) 29.376,87.822 31.246,89.692 31.246,87.005 31.582,86.669 40.853,86.669 44.028,89.844 44.028,95.305 42.758,96.575 33.328,96.575 U7.5@31.194,94.441
  Bottom Layer w0.254: v2(19.105,69.688) 19.105,70.636 19.263,70.794 28.28,70.794 29.423,71.937 v2@29.423,83.367
  other v3: 31.294,89.754 31.294,94.326
STBY: U2.52 U5.19 U6.19 | length 117.4
  Top Layer w0.254: U5.19 0.071,21.534 2.245,23.708 2.245,60.38 v2@2.118,60.507 ; v2(7.198,60.38) 9.092,62.273 U2.52 ; v2@32.852,40.187 32.852,36.377 40.52,28.709 40.52,24.631 44.902,20.249 U6.19
  Bottom Layer w0.254: v2(2.198,60.544) 7.034,60.544 v2(7.198,60.38) ; v2@2.245,40.314 v2(2.282,40.351) v2(32.805,40.351)
SWCLK: P1.2 U2.49 | length 21
  Top Layer w0.254: P1.2 7.198,76.255 7.198,71.937 11.897,67.238 15.199,67.238 16.527,65.91 U2.49
SWDIO: P1.3 U2.46 | length 16.2
  Top Layer w0.254: P1.3 11.643,76.509 17.612,70.54 17.612,67.873 18.12,67.365 18.882,67.365 19.327,66.92 U2.46
TXD: ESD2.1 R10.2 U7.4 U8.3 | length 76.9
  Top Layer w0.178: v2(23.153,69.688) 23.344,69.497 R10.2
  Top Layer w0.254: U7.4@26.694,94.441 26.694,95.751 28.026,97.083 44.536,97.083 45.425,96.194 45.425,88.193 36.709,79.477 30.9,79.477 ; U8.3@26.746,89.692 26.746,83.631 30.9,79.477 ; v2(30.9,76.673) 30.9,79.477
  Bottom Layer w0.254: v2(23.153,69.688) 29.46,69.688 30.947,71.175 v2@30.947,76.509
  other v3: 26.722,89.246 26.722,94.326
VIN: DC_IN1.1 DC_IN2.1 S1.1 S1.2
  other v4: 59.344,72.953 61.986,73.054 65.948,73.537 65.745,77.271 62.062,77.525 58.887,77.55 65.948,80.217 65.923,82.808
XX1: C10.1 U2.5 X1.1 | length 7.1
  Top Layer w0.178: C10.1 19.089,48.593 X1.1 20.327,50.86 U2.5
XX2: C11.2 U2.6 X1.3 | length 4.9
  Top Layer w0.178: U2.6 20.827,52.227 X1.3 22.836,51.578 C11.2
pads on no net: U2.4 U2.8 U2.11 U2.20 U2.24 U2.25 U2.28 U2.39 U2.40 U2.41 U2.44 U2.45 U2.51 U2.53 U2.54 U4.3 UWB1.3 UWB1.4 UWB1.5 UWB1.6 UWB1.7 UWB1.8 UWB1.10 UWB1.11 UWB1.12 UWB1.13 UWB1.14 UWB1.15 UWB1.19 UWB1.20 UWB1.21 UWB1.22

## Polygon pours and split planes (outlines as drawn)
GND on Top Layer "GND_L01_P036" (solid, remove dead copper, pour order 36): -26.071,-0.119 ccw(c-26.04,-0.063) -26.071,-0.119 -13.791,-6.883 -13.79,-6.883 ccw(c-13.759,-6.827) -13.748,-6.89 24.499,-0.128 62.747,-6.89 ccw(c62.759,-6.827) 62.789,-6.883 62.79,-6.883 75.07,-0.119 ccw(c75.039,-0.063) 75.103,-0.063 ccw(c75.039,-0.063) 75.103,-0.055 ccw(c75.039,-0.063) 75.102,-0.054 75.103,-0.054 75.103,-0.055 75.102,-0.054 74.47,4.706 74.47,4.705 74.47,4.706 74.47,4.708 cw(c74.407,4.699) 74.47,4.708 74.47,4.706 74.004,9.481 74.004,9.482 74.004,9.481 74.004,9.48 74.004,9.481 73.704,14.269 73.704,14.268 73.704,14.269 73.704,14.271 73.704,14.269 73.571,19.065 73.604,23.863 73.804,28.656 74.17,33.44 74.701,38.208 75.337,42.577 83.729,94.374 ccw(c83.666,94.384) 83.73,94.384 83.73,100.766 ccw(c83.666,100.766) 83.649,100.827 ccw(c83.632,100.766) 83.632,100.83 -34.69,100.83 ccw(c-34.69,100.766) -34.754,100.765 -34.654,93.908 ccw(c-34.59,93.909) -34.653,93.899 cw(c-34.59,93.909) -34.654,93.908 -34.653,93.899 -26.342,42.605 -25.657,37.857 -25.657,37.855 -25.657,37.857 -25.138,33.087 -25.138,33.088 -25.138,33.087 -25.138,33.086 cw(c-25.075,33.093) -25.138,33.086 -25.138,33.087 -24.784,28.303 -24.784,28.304 -24.784,28.303 -24.784,28.302 -24.784,28.303 -24.597,23.509 -24.576,18.711 -24.576,18.712 -24.576,18.711 -24.722,13.916 -24.722,13.917 -24.722,13.916 -24.722,13.915 -24.722,13.916 -25.034,9.129 -25.034,9.13 -25.034,9.129 -25.034,9.127 -25.034,9.129 -25.512,4.355 -25.512,4.356 -25.512,4.355 -25.512,4.354 -25.512,4.355 -26.103,-0.054 ccw(c-26.04,-0.063)
NetL1_1 on Top Layer "NETL1_1_L01_P028" (solid, remove dead copper, pour order 28): 56.601,52.252 56.601,50.601 50.632,50.601 49.997,49.966 49.743,49.712 49.743,47.045 49.743,44.251 51.013,42.981 51.648,42.346 53.934,42.346 55.458,42.346 55.839,42.727 57.363,44.251 57.363,45.267 57.363,51.744
+5V on Top Layer "+5V_L01_P030" (solid, remove dead copper, pour order 30): 57.871,52.125 57.871,49.331 57.871,38.028 58.633,37.266 61.046,37.266 68.508,37.266 69.85,38.608 69.85,46.736 68.525,48.061 61.935,48.061 61.554,48.061 59.141,50.474 58.633,50.982 58.633,51.744
GND on Bottom Layer "GND_L04_P037" (solid, remove dead copper, pour order 37): -26.071,-0.119 ccw(c-26.04,-0.063) -26.071,-0.119 -13.791,-6.883 -13.79,-6.883 ccw(c-13.759,-6.827) -13.748,-6.89 24.499,-0.128 62.747,-6.89 ccw(c62.759,-6.827) 62.789,-6.883 62.79,-6.883 75.07,-0.119 ccw(c75.039,-0.063) 75.103,-0.063 ccw(c75.039,-0.063) 75.103,-0.055 ccw(c75.039,-0.063) 75.102,-0.054 75.103,-0.054 75.103,-0.055 75.102,-0.054 74.47,4.706 74.47,4.705 74.47,4.706 74.47,4.708 cw(c74.407,4.699) 74.47,4.708 74.47,4.706 74.004,9.481 74.004,9.482 74.004,9.481 74.004,9.48 74.004,9.481 73.704,14.269 73.704,14.268 73.704,14.269 73.704,14.271 73.704,14.269 73.571,19.065 73.604,23.863 73.804,28.656 74.17,33.44 74.701,38.208 75.337,42.577 83.729,94.374 ccw(c83.666,94.384) 83.73,94.384 83.73,100.766 ccw(c83.666,100.766) 83.649,100.827 ccw(c83.632,100.766) 83.632,100.83 -34.69,100.83 ccw(c-34.69,100.766) -34.754,100.765 -34.654,93.908 ccw(c-34.59,93.909) -34.653,93.899 cw(c-34.59,93.909) -34.654,93.908 -34.653,93.899 -26.342,42.605 -25.657,37.857 -25.657,37.855 -25.657,37.857 -25.138,33.087 -25.138,33.088 -25.138,33.087 -25.138,33.086 cw(c-25.075,33.093) -25.138,33.086 -25.138,33.087 -24.784,28.303 -24.784,28.304 -24.784,28.303 -24.784,28.302 -24.784,28.303 -24.597,23.509 -24.576,18.711 -24.576,18.712 -24.576,18.711 -24.722,13.916 -24.722,13.917 -24.722,13.916 -24.722,13.915 -24.722,13.916 -25.034,9.129 -25.034,9.13 -25.034,9.129 -25.034,9.127 -25.034,9.129 -25.512,4.355 -25.512,4.356 -25.512,4.355 -25.512,4.354 -25.512,4.355 -26.103,-0.054 ccw(c-26.04,-0.063)

## Keep-outs
Keep-Out Layer:
  circle w0.127: c-22.1,50.6 r1.6
  circle w0.127: c-26.292,95.9 r1.6
  circle w0.127: c75.292,95.9 r1.6
  circle w0.127: c75.292,95.9 r1.6
  circle w0.127: c-26.292,95.9 r1.6
  circle w0.127: c0,0 r1.6
  circle w0.127: c71.1,50.6 r1.6
  circle w0.127: c49,0 r1.6
  lines w0.127: 12.644,-2.159 12.644,13.264 12.714,13.335 34.925,13.335 35.052,13.208 35.052,-1.905 ; 83.666,100.766 83.666,94.384 ; -34.69,100.766 -34.59,93.909 ; -34.69,100.766 83.632,100.766 83.666,94.384 ; -34.69,100.766 -34.59,93.909 ; -34.59,93.909 -26.279,42.615 ; -34.59,93.909 -26.279,42.615 ; -26.279,42.615 -25.594,37.864 ; -26.279,42.615 -25.594,37.864 ; -26.04,-0.063 -13.759,-6.827 ; -26.04,-0.063 -25.449,4.347 ; -26.04,-0.063 -25.449,4.347 ; -26.04,-0.063 -13.759,-6.827 ; -25.594,37.864 -25.074,33.093 ; -25.594,37.864 -25.074,33.093 ; -25.449,4.347 -24.97,9.123 ; -25.449,4.347 -24.97,9.123 ; -25.074,33.093 -24.72,28.306 ; -25.074,33.093 -24.72,28.306 ; -24.97,9.123 -24.658,13.913 ; -24.97,9.123 -24.658,13.913 ; -24.72,28.306 -24.533,23.51 ; -24.72,28.306 -24.533,23.51 ; -24.658,13.913 -24.512,18.71 ; -24.658,13.913 -24.512,18.71 ; -24.533,23.51 -24.512,18.71 ; -24.533,23.51 -24.512,18.71 ; -13.759,-6.827 24.499,-0.063 ; -13.759,-6.827 24.499,-0.063 ; 24.499,-0.063 62.759,-6.827 ; 62.759,-6.827 75.039,-0.063 ; 62.759,-6.827 75.039,-0.063 ; 74.407,4.699 73.941,9.476 73.641,14.267 73.507,19.064 73.54,23.864 73.74,28.66 74.106,33.445 74.638,38.216 ; 74.407,4.699 75.039,-0.063 ; 74.407,4.699 75.039,-0.063 ; 74.638,38.216 75.274,42.586 ; 74.638,38.216 75.274,42.586 ; 75.274,42.586 83.666,94.384 ; 75.274,42.586 83.666,94.384

## Other copper
Top Layer:
  rectangle net GND: 28.575,67.056 30.734,68.834
  rectangle net GND: 29.845,63.119 30.734,68.199
  rectangle net +12V: 47.625,15.875 48.895,17.145
  rectangle net DOUT1: 54.864,23.368 57.531,24.638
  rectangle net +12V: 51.816,23.368 53.975,31.623
  rectangle net +12V: 47.625,23.368 53.34,24.257
  rectangle net +12V: -3.937,24.638 -2.794,25.654
  rectangle net +12V: -3.683,17.272 3.81,18.288
  rectangle net DOUT2: 54.991,20.828 56.769,21.59
  rectangle net COUT2: 54.991,19.558 56.896,20.32
  rectangle net COUT1: 54.864,16.764 56.134,17.653
  rectangle net BOUT2: -11.049,20.066 -8.509,20.955
  rectangle net BOUT1: -11.303,16.891 -9.906,18.415
  rectangle net AOUT1: -11.303,24.003 -9.906,24.892
  rectangle net VIN: 54.315,71.403 70.444,79.252
  rectangle net VIN: 63.561,75.823 68.311,88.646
  rectangle net +3.3V: 41.996,34.726 61.173,36.504
  rectangle net +3.3V: 17.231,44.759 19.39,46.537
  pour cut-out: 25.654,67.31 30.861,67.31 30.861,66.421 25.835,66.421 25.327,66.929
  pour cut-out: -2.54,21.971 -2.413,21.844 -2.413,20.234 -0.422,20.234 -0.381,20.193 -0.254,20.32 -0.254,21.971
  pour cut-out: 32.852,46.283 36.789,46.283 36.789,45.394 36.027,44.632 33.487,44.632
  pour cut-out: -1.946,48.315 2.245,52.506 2.245,60.253 3.642,61.65 4.658,60.634 4.658,52.358 5.301,51.715 7.89,51.715 7.89,50.404 7.579,50.093 7.579,49.712
  pour cut-out: 38.694,41.076 38.763,41.144 40.541,41.144 40.541,42.16 40.726,42.346 40.472,42.6 38.948,42.6
  pour cut-out: 0.594,54.03 1.632,54.03 1.727,54.125 1.864,53.988 1.864,53.268 1.102,53.268
  pour cut-out: 4.785,63.936 5.039,63.936 5.928,64.825 6.182,64.571 7.706,64.571
  pour cut-out: 24.927,40.822 31.455,40.822 31.836,40.441 30.947,39.552 25.435,39.552
  pour cut-out: 14.818,97.686 14.818,85.399 15.58,84.637 31.963,84.637 34.503,87.177 34.503,98.226
  pour cut-out: 39.71,87.304 39.71,82.859 39.837,82.732 40.726,83.621 40.98,83.621 40.98,87.05 40.853,87.177
  pour cut-out: 32.09,50.855 32.09,55.935 31.963,56.062 31.709,55.808 31.709,54.792
  pour cut-out: 19.644,69.397 22.565,69.397 22.565,69.29 22.455,69.18 19.804,69.18
  pour cut-out: 45.847,92.202 45.847,99.06 45.72,98.933 44.704,98.933
  pour cut-out: 42.418,58.039 48.243,58.039 48.387,58.183 48.387,63.119 48.133,63.373 42.418,63.373
  pour cut-out: 56.7,60.134 48.07,60.134 46.609,61.595 48.133,63.119 48.133,63.373 52.832,63.373 53.34,63.881
  pour cut-out: 61.722,53.975 61.722,51.764 61.745,51.741 61.722,51.719 61.722,48.641 61.468,48.387 61.087,48.768 61.087,53.721 60.96,53.848
  pour cut-out: 61.722,48.892 73.911,48.892 73.533,48.514 73.533,48.006 62.158,48.006 61.715,48.449
  pour cut-out: 51.648,41.957 57.324,41.957 57.912,42.545 57.531,42.926 57.531,43.18 55.753,43.18
  pour cut-out: 74.803,53.975 76.835,53.975 76.708,53.848 76.708,53.467 74.422,53.467 74.295,53.34 74.549,53.34
  pour cut-out: 7.62,52.451 7.62,50.505 8.087,50.038 14.097,50.038 14.097,51.054 13.462,51.689 13.335,51.689
  pour cut-out: 31.71,61.888 31.749,61.849 41.529,61.849 42.418,60.96 41.656,60.198 33.655,60.198
  pour cut-out: -2.159,42.926 -2.159,62.865 -1.524,63.5 0.635,61.341 0.635,51.308 1.016,50.927
  pour cut-out: -5.334,26.543 -2.032,26.543 -2.21,26.365 -2.21,25.169 -4.722,25.169 -5.588,26.035
  pour cut-out: 76.708,90.17 84.328,90.17 85.852,88.646 85.725,88.519 78.105,88.519
Bottom Layer:
  rectangle net +12V: 48.006,23.368 51.181,24.257
  rectangle net DOUT1: 54.864,23.368 57.531,24.638
  rectangle net +12V: -3.937,17.272 -1.905,25.654
  rectangle net +12V: 1.397,16.764 3.81,18.669
  rectangle net VIN: 54.341,71.378 70.495,79.201
  rectangle net VIN: 63.459,76.255 68.361,88.773
  rectangle net +3.3V: 42.123,34.853 44.536,36.504
  pour cut-out: 14.818,97.845 14.818,85.558 15.58,84.796 31.963,84.796 34.503,87.336 34.503,98.385
  pour cut-out: 31.455,74.35 31.465,74.36 31.465,76.444 30.385,77.525 29.296,77.525 29.423,77.398 29.423,76.89
  pour cut-out: 15.65,74.851 15.65,65.898 15.834,65.714 15.961,65.841 16.977,65.841 16.977,67.619 17.231,67.873

## Silkscreen, mask and mechanical layers (free items; w line width, h text height)
Top Overlay:
  text "Drive-motor V1.0.2" at -31.537,90.098 h2.54
  text "1" at 4.277,77.398 h1.52
  text "K1" at -21.59,65.913 h1.52
  text "12V" at 48.387,57.912 h1.52
  text "3.3V" at 39.37,57.404 h1.52
  text "K2" at -21.336,46.101 h1.52
  text "MA" at -18.542,11.049 h1.52
  text "MD" at 62.103,10.795 h1.52
  text "MC" at 58.293,6.985 h1.52
  text "MB" at -6.096,3.683 h1.52

## Text inside footprints (layer, text, board x,y; h text height)
S1: Top Overlay "CE" at 52.08,68.686 h2.54 r270